# Altium PCB BodyPCB.PcbDoc
Units mil, origin at the board's own origin, x right, y up, seen from the top; angles counter-clockwise.
Board outline 2795.28 x 4094.49 mil, 2 copper layers (Top Layer, Bottom Layer); 58 components, 60 nets, 254 pads, 20 vias.
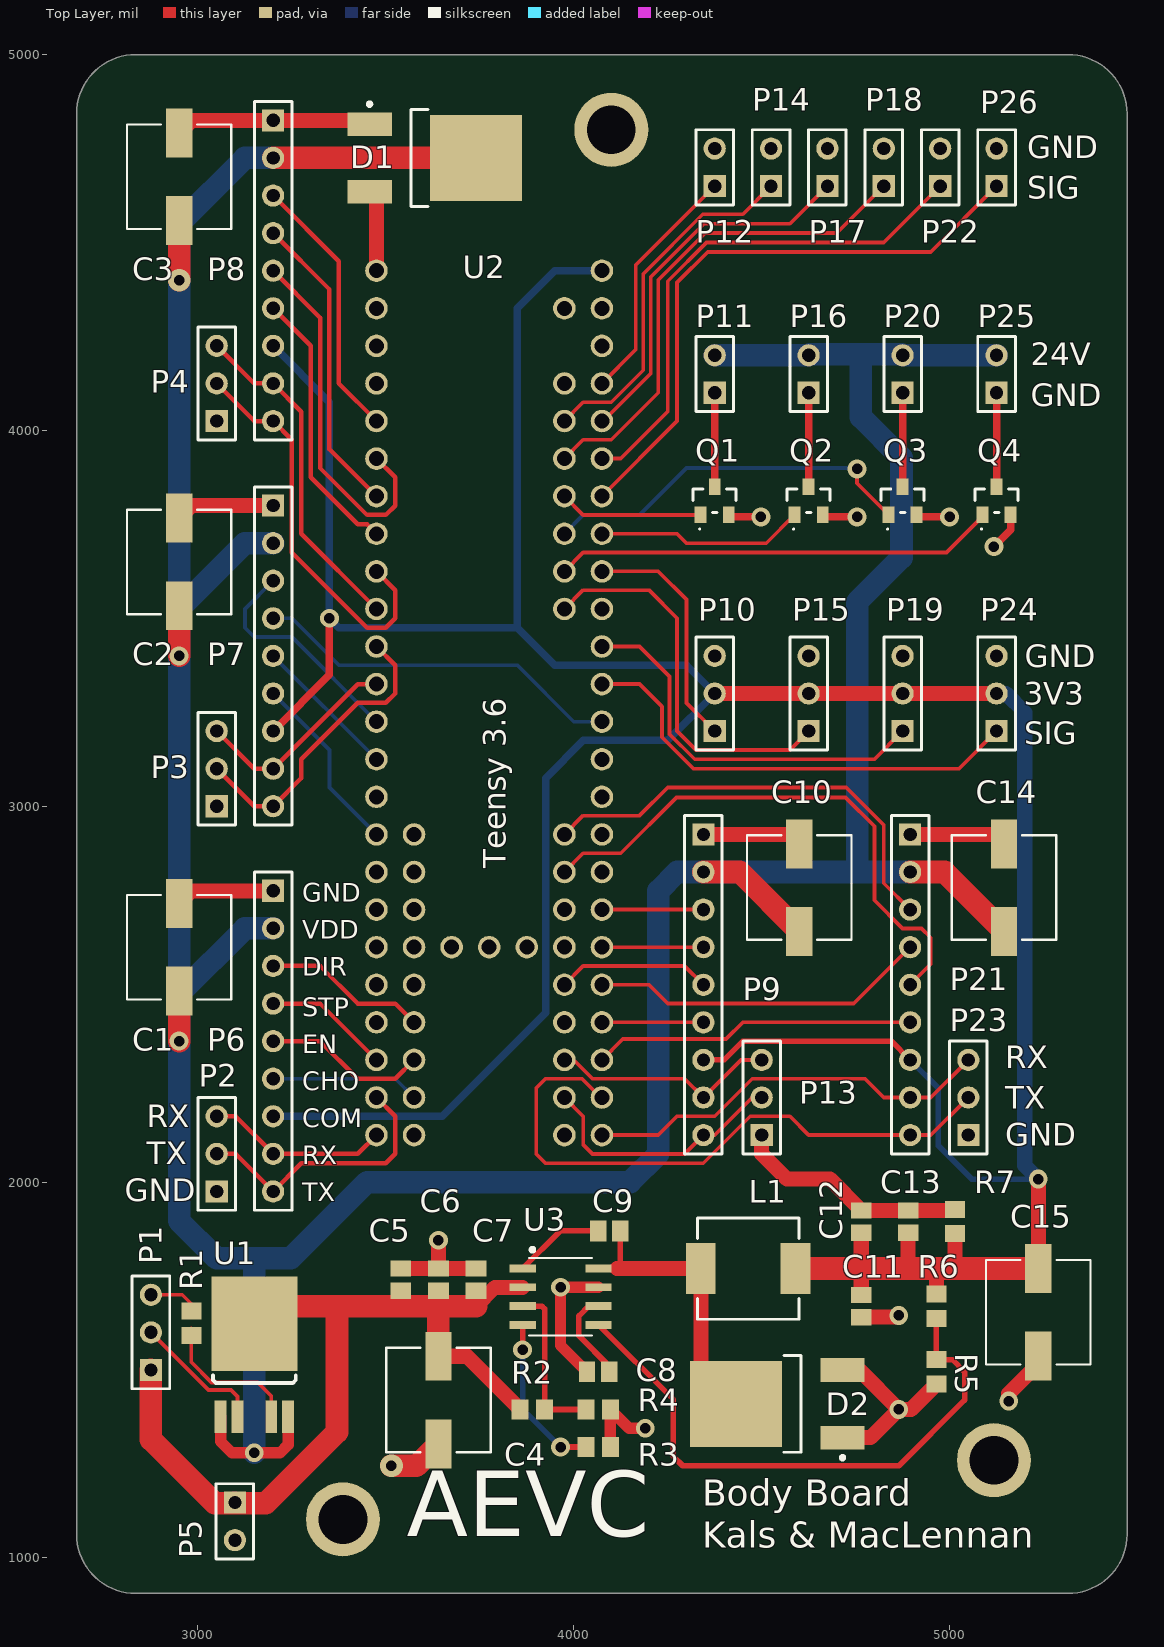
[diagram p0: Top Layer view]
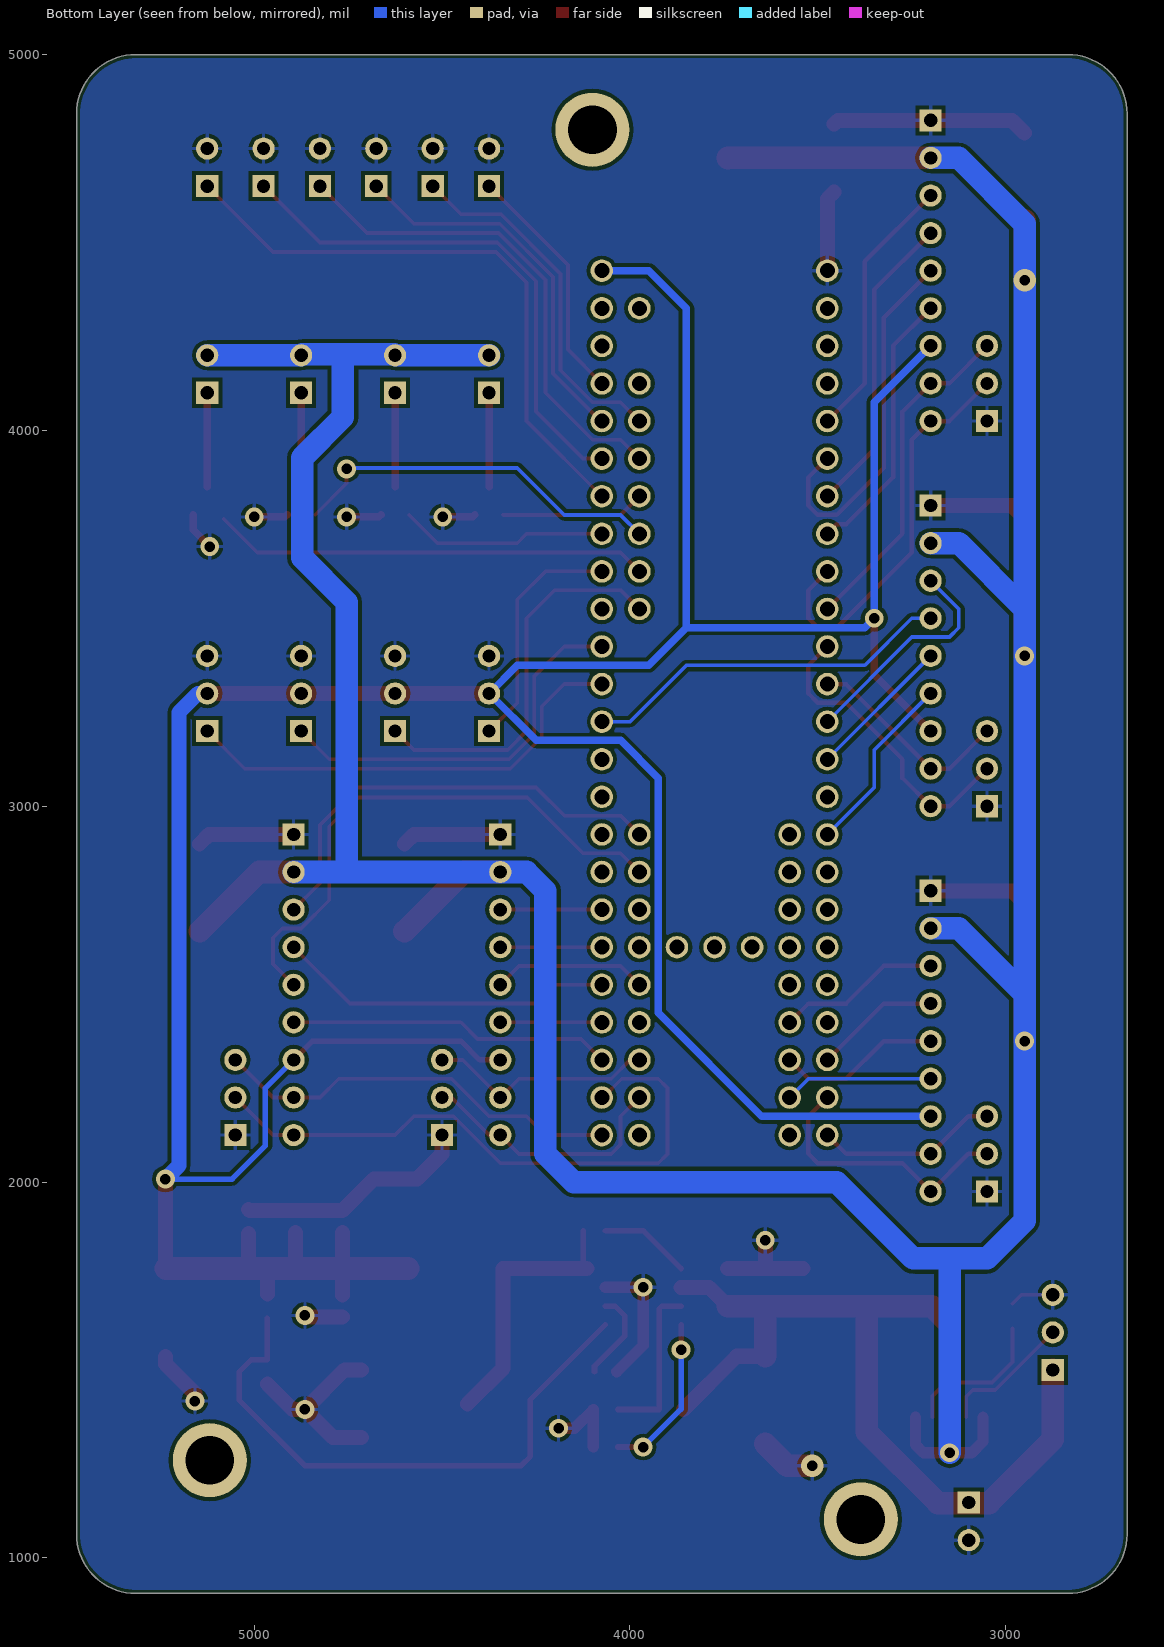
[diagram p1: Bottom Layer view, seen from below]

## Layer stack, top to bottom
Top Solder: solder mask 0.4, Solder Resist, Dk 3.5
Top Layer: signal copper 1.4
Dielectric 1: dielectric 12.6, FR-4, Dk 4.8
Bottom Layer: signal copper 1.4
Bottom Solder: solder mask 0.4, Solder Resist, Dk 3.5

## Board outline
2677.17,1062.99 2677.17,4842.52 cw(c2834.65,4842.52) 2834.65,5000 5314.96,5000 cw(c5314.96,4842.52) 5472.44,4842.52 5472.44,1062.99 cw(c5314.96,1062.99) 5314.96,905.51 2834.65,905.51 cw(c2834.65,1062.99)

## Design rules (kind name [scope] priority, off if disabled: settings)
BoardOutlineClearance [All] p1: gap=10 ignorepadtopadclearanceinfootprint=FALSE
Clearance Clearance_1 [InNamedPolygon('GND_plane')] p1: gap=10 ignorepadtopadclearanceinfootprint=FALSE
Clearance [All] p2: gap=10 ignorepadtopadclearanceinfootprint=FALSE except(0: Arc-Hole Track-Hole SMDPad-Hole THPad-Hole Via-Hole Fill-Hole Poly-Hole Region-Hole Text-Hole)
HoleSize [All] p1: absolutevalues=TRUE maxlimit=248.03 minlimit=11.81 maxpercent=80.000 minpercent=20.000
PolygonConnect [All] p1: connectstyle=Relief reliefconductorwidth=10 reliefentries=4 polygonreliefangle="90 Angle" airgapwidth=10
RoomDefinition U_StepperInterface6 [InComponentClass('U_StepperInterface6')] p1: confinementstyle=ConfineIn formatcopy=TRUE lockcomponents=FALSE outline 4275,2058.5 4775,2058.5 4775,3008.5 4275,3008.5
RoomDefinition U_StepperInterface5 [InComponentClass('U_StepperInterface5')] p2: confinementstyle=ConfineIn formatcopy=TRUE lockcomponents=FALSE outline 4820,2047 5320,2047 5320,3022 4820,3022
RoomDefinition U_StepperInterface4 [InComponentClass('U_StepperInterface4')] p3: confinementstyle=ConfineIn formatcopy=TRUE lockcomponents=FALSE outline 2791.34,980.32 3267.72,980.32 3267.72,2842.52 2791.34,2842.52
RoomDefinition U_StepperInterface3 [InComponentClass('U_StepperInterface3')] p4: confinementstyle=ConfineIn formatcopy=TRUE lockcomponents=FALSE outline 2775,3950 3275,3950 3275,4900 2775,4900
RoomDefinition U_StepperInterface2 [InComponentClass('U_StepperInterface2')] p5: confinementstyle=ConfineIn formatcopy=TRUE lockcomponents=FALSE outline 2775,2925 3275,2925 3275,3875 2775,3875
RoomDefinition Drive2Pin4 [InComponentClass('Drive2Pin4')] p6: confinementstyle=ConfineIn formatcopy=TRUE lockcomponents=FALSE outline 4975,3675 5200,3675 5200,4275 4975,4275
RoomDefinition Drive2Pin3 [InComponentClass('Drive2Pin3')] p7: confinementstyle=ConfineIn formatcopy=TRUE lockcomponents=FALSE outline 4725,3675 4950,3675 4950,4275 4725,4275
RoomDefinition Drive2Pin2 [InComponentClass('Drive2Pin2')] p8: confinementstyle=ConfineIn formatcopy=TRUE lockcomponents=FALSE outline 4475,3675 4700,3675 4700,4275 4475,4275
RoomDefinition Drive2Pin1 [InComponentClass('Drive2Pin1')] p9: confinementstyle=ConfineIn formatcopy=TRUE lockcomponents=FALSE outline 4225,3675 4450,3675 4450,4275 4225,4275
RoutingVias [All] p1: holewidth=28 width=50 viastyle="Through Hole" minholewidth=28 minwidth=50 maxholewidth=28 maxwidth=50
SolderMaskExpansion [All] p1: expansion=4
Width [All] p1: maxlimit=60 minlimit=8 preferedwidth=10 minimp=50.000000 maximp=50.000000 favimp=50.000000
29 further rules are at their usual default settings.

## Classes and differential pairs
channel class StepperInterface: U_StepperInterface2 U_StepperInterface3 U_StepperInterface4 U_StepperInterface5 U_StepperInterface6
channel class Sense3Pin: Sense3Pin1 Sense3Pin2 Sense3Pin3 Sense3Pin4
channel class Sense2Pin: Sense2Pin1 Sense2Pin2 Sense2Pin3 Sense2Pin4 Sense2Pin5 Sense2Pin6
channel class Drive2Pin: Drive2Pin1 Drive2Pin2 Drive2Pin3 Drive2Pin4
component class U_StepperInterface6: C10 P9 P13
component class U_StepperInterface5: C14 P21 P23
component class U_StepperInterface4: C1 P5 P6
component class U_StepperInterface3: C3 P4 P8
component class U_StepperInterface2: C2 P3 P7
component class U_POS3V3: C12 C13 C15 R5 R6 R7
component class U_LMR14050_mod: C4 C5 C6 C7 C8 C9 C11 D2 L1 R2 R3 R4 U3
component class Sense3Pin4: P24
component class Sense3Pin3: P19
component class Sense3Pin2: P15
component class Sense3Pin1: P10
component class Sense2Pin6: P26
component class Sense2Pin5: P18
component class Sense2Pin4: P22
component class Sense2Pin3: P14
component class Sense2Pin2: P17
component class Sense2Pin1: P12
component class Main: D2 P1 P5 R1 U1 U2
component class Drive2Pin4: P25 Q4
component class Drive2Pin3: P20 Q3
component class Drive2Pin2: P16 Q2
component class Drive2Pin1: P11 Q1

## Components (designator, comment, footprint, x,y, rotation, side; value= is the part's Value field where it differs from the comment)
C1 "EEEFK1V680XP" CAP_EEFK_D8 2950,2625 r90 top value=82uF (schematic designator C10)
C2 "EEEFK1V680XP" CAP_EEFK_D8 2950,3650 r90 top value=82uF (schematic designator C10)
C3 "EEEFK1V680XP" CAP_EEFK_D8 2950,4675 r90 top value=82uF (schematic designator C10)
C4 "EEEFK1V680XP" CAP_EEFK_D8 3640,1420 r270 top value=82uF
C5 "Cap" C0805 3540,1740.47 r270 top value=10µF
C6 "Cap" C0805 3640,1740.47 r270 top value=10µF
C7 "Cap" C0805 3740,1740.47 r270 top value=0.1µF
C8 "Cap" C0805 4065,1495 r0 top value=22µF
C9 "Cap" C0805 4094.53,1870 r180 top value=0.1µF
C10 "EEEFK1V680XP" CAP_EEFK_D8 4600,2783.5 r90 top value=82uF
C11 "Cap" C0805 4765,1670 r90 top value=0.1µF
C12 "Cap" C0805 4765,1895 r270 top value=10µF
C13 "Cap" C0805 4890,1895 r270 top value=10µF
C14 "EEEFK1V680XP" CAP_EEFK_D8 5145,2783.5 r90 top value=82uF (schematic designator C10)
C15 "EEEFK1V680XP" CAP_EEFK_D8 5236.22,1653.54 r270 top value=82uF
D1 "MBRD835LG" ONSC-DPAK-3-369C-01_V 3629.92,4724.8 r0 top (schematic designator D2)
D2 "MBRD835LG" ONSC-DPAK-3-369C-01_V 4541.77,1409.84 r180 top (schematic designator D1)
L1 "Ind" IHLP-2525C7 4464.02,1770 r0 top value=3.3µH
P1 "Header 3" HDR1X3 2875,1500 r90 top
P2 "Header 3" HDR1X3 3050,1975 r90 top (schematic designator P12)
P3 "Header 3" HDR1X3 3050,3000 r90 top (schematic designator P12)
P4 "Header 3" HDR1X3 3050,4025 r90 top (schematic designator P12)
P5 "Header 2" HDR1X2 3098.43,1147.24 r270 top (schematic designator P2)
P6 "Header 9" HDR1X9 3200,2775 r270 top (schematic designator P8)
P7 "Header 9" HDR1X9 3200,3800 r270 top (schematic designator P8)
P8 "Header 9" HDR1X9 3200,4825 r270 top
P9 "Header 9" HDR1X9 4345,2925 r270 top (schematic designator P8)
P10 "Header 3" HDR1X3 4375,3200 r90 top (schematic designator P23)
P11 "Header 2" HDR1X2 4375,4100 r90 top (schematic designator P23)
P12 "Header 2" HDR1X2 4375,4650 r90 top (schematic designator P25)
P13 "Header 3" HDR1X3 4500,2125 r90 top (schematic designator P12)
P14 "Header 2" HDR1X2 4525,4650 r90 top (schematic designator P25)
P15 "Header 3" HDR1X3 4625,3200 r90 top (schematic designator P23)
P16 "Header 2" HDR1X2 4625,4100 r90 top (schematic designator P23)
P17 "Header 2" HDR1X2 4675,4650 r90 top (schematic designator P25)
P18 "Header 2" HDR1X2 4825,4650 r90 top (schematic designator P25)
P19 "Header 3" HDR1X3 4875,3200 r90 top (schematic designator P23)
P20 "Header 2" HDR1X2 4875,4100 r90 top (schematic designator P23)
P21 "Header 9" HDR1X9 4895,2925 r270 top (schematic designator P8)
P22 "Header 2" HDR1X2 4975,4650 r90 top (schematic designator P25)
P23 "Header 3" HDR1X3 5050,2125 r90 top (schematic designator P12)
P24 "Header 3" HDR1X3 5125,3200 r90 top (schematic designator P23)
P25 "Header 2" HDR1X2 5125,4100 r90 top (schematic designator P23)
P26 "Header 2" HDR1X2 5125,4650 r90 top (schematic designator P25)
Q1 "ZXMS6004FFTA" DIOD-SOT23F-3_V 4375,3812.8 r90 top
Q2 "ZXMS6004FFTA" DIOD-SOT23F-3_V 4625,3812.8 r90 top (schematic designator Q1)
Q3 "ZXMS6004FFTA" DIOD-SOT23F-3_V 4875,3812.8 r90 top (schematic designator Q1)
Q4 "ZXMS6004FFTA" DIOD-SOT23F-3_V 5125,3812.8 r90 top (schematic designator Q1)
R1 "Res" R0805 2982.28,1624.02 r270 top value=1k
R2 "Res" R0805 3890,1395 r180 top value=39k
R3 "Res" R0805 4065,1295 r180 top value=33k
R4 "Res" R0805 4065,1395 r180 top value=10k
R5 "Res" R0805 4965,1495 r90 top value=2.7k
R6 "Res" R0805 4965,1670 r90 top value=15k
R7 "Res" R0805 5015,1895 r270 top value=1k
U1 "BTS50080-1TEA" BTS50080 3150.24,1623.03 r0 top
U2 "Teensy3p6" TEENSY3P6_FULL 3775,3225 r0 top
U3 "LMR14050SDDAR" DDA8 3965,1695 r0 top value=Value

## Footprints (in the part's own frame and the unit in brackets; to place one, negate y for a bottom-side part, rotate by r counter-clockwise, add the part's x,y. Pads: shape width x height; smd on the part's side, far side on the other; paste and mask are expansions set on the pad)
BTS50080 [mm] "Smart High-Side Power Switch"
  rect 5.8x6.4 smd: 1(0,0)
  rect 0.8x2.2 smd: 2(-2.28,-6.3) 3(-1.14,-6.3) 4(1.14,-6.3) 5(2.28,-6.3)
  silkscreen extent -2.8,-4 2.8,-3.5
C0805 [mm]
  rect 1.1x1.4 smd: 1(-0.75,0) 2(0.75,0)
  body extent -1.1,-0.72 1.1,0.72, height 1.4
CAP_EEFK_D8 [mil]
  rect 130x70 smd paste+0 mask+0: 1(-116.5,0) 2(116.5,0)
  silkscreen extent -139,-139 139,139, body extent -154,-134 154,134, height 317
DDA8 [mil]
  rect 70x21 smd paste+0 mask+0: 1(-101,75) 2(-101,25) 3(-101,-25) 4(-101,-75) 5(101,-75) 6(101,-25) 7(101,25) 8(101,75)
  silkscreen extent -84,-103 84,130, body extent -122,-100 122,100, height 66
DIOD-SOT23F-3_V [mm] "SOTFL, 3-Leads, Body 2.9x1.6mm, Pitch 0.95mm"
  rect 1.11x0.8 smd: 1(-0.945,0.95) 2(-0.945,-0.95) 3(0.945,0)
  silkscreen extent -1.96,-1.45 0.8,1.45, body extent -1.2,-1.45 1.2,1.45, height 1
HDR1X2 [mm] "Connector; Header; 2 Position"
  rect 1.5x1.5 hole 0.9: 1(0,0)
  round 1.5 hole 0.9: 2(2.54,0)
  silkscreen extent -1.27,-1.27 3.81,1.27
HDR1X3 [mm] "Connector; Header; 3 Position"
  rect 1.5x1.5 hole 0.9: 1(0,0)
  round 1.5 hole 0.9: 2(2.54,0) 3(5.08,0)
  silkscreen extent -1.27,-1.27 6.35,1.27
HDR1X9 [mm]
  rect 1.5x1.5 hole 0.9: 1(0,0)
  round 1.5 hole 0.9: 2(2.54,0) 3(5.08,0) 4(7.62,0) 5(10.16,0) 6(12.7,0) 7(15.24,0) 8(17.78,0) 9(20.32,0)
  silkscreen extent -1.27,-1.27 21.59,1.27
IHLP-2525C7 [mm] "Chip Inductor, 2-Leads, Body 6.47x6.47mm, IPC Medium Density"
  rect 2.02x3.429 smd: 1(-3.2,0) 2(3.2,0)
  silkscreen extent -3.43,-3.43 3.43,3.43, body extent -3.54,-3.3 3.54,3.37, height 2.89
ONSC-DPAK-3-369C-01_V [mm] "DPAK, 3-Leads, Body 6.54x6.095mm, Pitch 2.29mm"
  rect 3x1.6 smd: 1(-4.4,2.29) 3(-4.4,-2.29)
  rect 6.2x5.8 smd: 4(2.8,0)
  silkscreen extent -4.52,-3.27 -0.45,3.76, body extent -1.6,-3.27 4.49,3.27, height 2.38
R0805 [mm]
  rect 1.15x1.35 smd: 1(-0.825,0) 2(0.825,0)
  body extent -1.05,-0.67 1.05,0.67, height 0.9
TEENSY3P6_FULL [mil] "TH, all pins"
  round 60 hole 40: 0(-300,1200) 1(-300,1100) 2(-300,1000) 3(-300,900) 4(-300,800) 5(-300,700) 6(-300,600) 7(-300,500) 8(-300,400) 9(-300,300) 10(-300,200) 11(-300,100) 12(-300,0) 13(-300,-100) 14(-300,-200) 15(-300,-300) 16(-300,-400) 17(-300,-500) 18(-300,-600) 19(-300,-700) 20(-300,-800) 21(-300,-900) 22(-300,-1000) 23(-300,-1100) 24(300,-1100) 25(300,-1000) 26(300,-900) 27(300,-800) 28(300,-700) 29(300,-600) 30(300,-500) 31(300,-400) 32(300,-300) 33(300,-200) 34(300,-100) 35(300,0) 36(300,100) 37(300,200) 38(300,300) 39(300,400) 40(300,500) 41(300,600) 42(300,700) 43(300,800) 44(300,900) 45(300,1000) 46(300,1100) 47(300,1200) 48(-200,-600) 49(-100,-600) 50(0,-600) 51(100,-600) 52(200,-600) 53(-200,-300) 54(-200,-400) 55(-200,-500) 56(-200,-700) 57(-200,-800) 58(-200,-900) 59(-200,-1000) 60(-200,-1100) 61(200,-1100) 62(200,-1000) 63(200,-900) 64(200,-800) 65(200,-700) 66(200,-500) 67(200,-400) 68(200,-300) 69(200,300) 70(200,400) 71(200,500) 72(200,600) 73(200,700) 74(200,800) 75(200,900) 76(200,1100)

## Part data
C1 C2 C3 C4 C10 C14 C15: "Polarized Capacitor (Surface Mount)", Supplier Part Number 1=P18960DKR-ND, Built_By=EMA_UL_Team, C="Copyright (C) 2015 Accelerated Designs. All rights reserved", Manufacturer_Part_Number=EEEFK1V680XP, Supplier 1=Digi-Key, Vendor=Panasonic
C5 C6 C7 C8 C9 C11 C12 C13: "capacitor"
D1 D2: library part CMP-1055-00169-1, "SWITCHMODE(TM) Power Rectifier, 3-Pin DPAK, Pb-Free, Tube", Manufacturer="On Semiconductor", ComponentLink1Description="Manufacturer URL", ComponentLink1URL=http://www.onsemi.com/, ComponentLink2Description=Datasheet, ComponentLink2URL=http://www.onsemi.cn/pub_link/Collateral/MBRD835L-D.PDF, ComponentLink3Description="Package Specification", ComponentLink3URL=http://www.onsemi.cn/pub_link/Collateral/369C.PDF, Configuration=Single, DatasheetVersion="Rev. 11", IFSM Max (A)=75, Mounting Technology="Surface Mount", PackageDescription="3-Pin Flange Mount, Body 6.54 x 6.095 mm, Pitch 2.29 mm", PackageReference=DPAK-3-369C-01, PackageVersion="Rev. E, 02/2014", Packing=Tube, PartNumber=MBRD835LG, RoHS=TRUE
L1: "Inductor", Supplier Part Number 1=541-2580-1-ND, Supplier 1=Digi-Key
P1 P2 P3 P4 P10 P13 P15 P19 P23 P24: "Header, 3-Pin", LatestRevisionDate=17-Jul-2002, LatestRevisionNote="Re-released for DXP Platform.", Publisher="Altium Limited"
P5 P11 P12 P14 P16 P17 P18 P20 P22 P25 P26: "Header, 2-Pin", LatestRevisionDate=17-Jul-2002, LatestRevisionNote="Re-released for DXP Platform.", Publisher="Altium Limited"
P6 P7 P8 P9 P21: "Header, 9-Pin", LatestRevisionDate=17-Jul-2002, LatestRevisionNote="Re-released for DXP Platform.", Publisher="Altium Limited"
Q1 Q2 Q3 Q4: library part CMP-2000-07435-1, "N-Channel Self Protected Enhancement Mode Intellifet(TM) MOSFET, 60 V, 1.3 A, -40 to 150 degC, 3-Pin SOT23, RoHS, Tape and Reel", Current - Output (Max)=1.3A, Manufacturer="Diodes Inc", Operating Temperature=-40°C~150°C(TJ), Package / Case=SOT-23-3FlatLeads, Package Description="3-Pin Small Outline Transistor Flat Lead, Body 2.9 x 1.6 mm, Pitch 0.95 mm", Package Reference=SOT23F-3, Standard Package=3,000, Supplier Device Package=SOT-23F, Voltage - Load=60V(Max), Voltage - Supply (Vcc/Vdd)=3.3V,5V, Category=IntegratedCircuits(ICs), Datasheet URL=https://datasheet.ciiva.com/15109/getdatasheetpartid-411522-15109086.pdf, Datasheet Version="Rev. 6-2, 10/2014", Family=PMIC-PowerDistributionSwitches,LoadDrivers, Fault Protection=CurrentLimiting(Fixed),OverTemperature,OverVoltage, Featured Product=ZXMS6004FF60VN-ChannelMOSFET, Features=AutoRestart, Input Type=Non-Inverting, Interface=On/Off, Manufacturer URL=http://www.diodes.com/, Mounting Technology=SurfaceMount, Number of Outputs=1, Online Catalog=GeneralPurpose, Other Names=ZXMS6004FFTR, Output Configuration=LowSide, Output Type=N-Channel, Packaging=Tape&Reel(TR), PCN Design/Specification=PartMarkingUpdate25/Sep/2015, Product Training Modules=IntelliFET's, Ratio - Input=Output:1:1, Rds On (Typ)=350mOhm, RoHS Information=RoHSCertofCompliance, Series=Automotive,AEC-Q101,INTELLIFET®, Switch Type=GeneralPurpose
R1 R2 R3 R4 R5 R6 R7: "resistor"
U1: "Smart High-Side Power Switch"
U3: "dc-dc converter", Supplier Part Number 1=296-41103-5-ND, Built_By=EMA_UL_Team, C="Copyright (C) 2016 Accelerated Designs. All rights reserved", Manufacturer_Part_Number=LMR14050SDDAR, RefDes=RefDes, Supplier 1=Digi-Key, Type=Type, Vendor="Texas Instruments"

## Free pads (board coordinates)
  round 196.85 hole 129.92 unplated: 1(3385.83,1102.36) 2(4100,4800) 3(5118.11,1259.84)

## Via types
v1: diameter 50, hole 28, Top Layer to Bottom Layer, 18 vias
v2: diameter 60, hole 28, Top Layer to Bottom Layer, 2 vias

## Nets (pads, with @x,y where several pads share a name; then routed paths per layer and width w, separated by ;. In a path a pad name is that pad's centre, name@x,y a point inside that pad or via, vN(x,y) a via of type N, cw(c..) or ccw(c..) an arc to the next point about the centre after c; other vN are vias at no path point)
2ACTIVE1: Q1.1 U2.72 | length 383.6
  Top Layer w10: U2.72 4025,3775 4337.01,3775 Q1.1
2ACTIVE2: Q2.1 U2.40 | length 554.3
  Top Layer w10: U2.40 4275,3725 4300,3700 4512.01,3700 Q2.1
2ACTIVE3: Q3.1 U2.71 | length 1004.2
  Top Layer w10: v1(4753.94,3897.64) 4753.94,3859.25 Q3.1
  Bottom Layer w10: U2.71 4025,3775 4175,3775 4300,3900 v1@4750,3900
2ACTIVE4: Q4.1 U2.70 | length 1163.4
  Top Layer w10: U2.70 4025,3675 4991.54,3675 Q4.1@5080.71,3764.17
2SIGNAL1: P12.1 U2.44 | length 649.3
  Top Layer w10: U2.44 4165,4215 4165,4440 P12.1
2SIGNAL2: P17.1 U2.43 | length 1009.2
  Top Layer w10: U2.43 4078.28,4025 4205,4151.72 4205,4408.28 4346.72,4550 4575,4550 P17.1
2SIGNAL3: P14.1 U2.74 | length 959.2
  Top Layer w10: U2.74 4025,4075 4100,4075 4185,4160 4185,4416.57 4343.43,4575 4450,4575 P14.1
2SIGNAL4: P22.1 U2.42 | length 1403.4
  Top Layer w10: U2.42 4125,3925 4250,4050 4250,4396.72 4353.28,4500 4825,4500 P22.1
2SIGNAL5: P18.1 U2.73 | length 1326
  Top Layer w10: U2.73 4025,3975 4100,3975 4225,4100 4225,4400 4350,4525 4700,4525 P18.1
2SIGNAL6: P26.1 U2.41 | length 1607.5
  Top Layer w10: U2.41 4275,4025 4275,4393.43 4356.57,4475 4950,4475 P26.1
3SIGNAL1: P10.1 U2.39 | length 637.1
  Top Layer w10: U2.39 4225,3625 4300,3550 4300,3275 P10.1
3SIGNAL2: P15.1 U2.69 | length 1043.2
  Top Layer w10: U2.69 4025,3575 4200,3575 4275,3500 4275,3200 4325,3150 4575,3150 P15.1
3SIGNAL3: P19.1 U2.37 | length 1045.1
  Top Layer w10: U2.37 4175,3425 4255,3345 4255,3191.72 4321.72,3125 4800,3125 P19.1
3SIGNAL4: P24.1 U2.36 | length 1232.4
  Top Layer w10: U2.36 4175,3325 4235,3265 4235,3183.43 4318.43,3100 5025,3100 P24.1
CHOP_M2: P7.6 U2.15 | length 488.9
  Bottom Layer w10: P7.6 3350,3150 3350,3050 U2.15
CHOP_M3: P8.6 U2.7 | length 728.6
  Top Layer w12: P8.6 3300,4225 3300,3875 3425,3750 3450,3750 U2.7
CHOP_M4: P6.6 U2.59 | length 395.7
  Bottom Layer w10: P6.6 3525,2275 U2.59
CHOP_M5: P21.6 U2.26 | length 861.4
  Top Layer w10: U2.26 4130.47,2380.47 4405.47,2380.47 4450,2425 P21.6
CHOP_M6: P9.6 U2.27 | length 270
  Top Layer w10: U2.27 P9.6
COMM_U_StepperInterface2: C11.2 C12.2 C13.2 C15.1 L1.2 P6.7 P7.7 P8.7 P9.7 P10.2 P15.2 P19.2 P21.7 P24.2 R6.2 R7.2 U2.47 | length 9941
  Top Layer w15: P9.7 4400,2325 4450,2375 4845,2375 P21.7
  Top Layer w20: P7.7 3350,3350 v1(3350,3500)
  Top Layer w40: P10.2 P15.2 P19.2 P24.2 ; C11.2 4765,1770 C12.2 ; 4890,1770 C13.2 ; R6.2 4965,1770 ; 5015,1770 R7.2 ; C15.1 v1(5236.22,2007.87)
  Top Layer w60: L1.2 4765,1770 4890,1770 4965,1770 5015,1770 C15.1@5234.57,1770
  Bottom Layer w15: P21.7 4970,2250 4970,2096.93 5059.06,2007.87 v1(5236.22,2007.87)
  Bottom Layer w20: P6.7 3650,2175 3925,2450 3925,3075 4025,3175 4250,3175 P10.2 4300,3375 3950,3375 3850,3475 ; P8.7 3350,4075 v1(3350,3500) 3375,3475 3850,3475 ; U2.47 3950,4425 3850,4325 3850,3475
  Bottom Layer w40: P24.2 5150,3300 5200,3250 5200,2044.09 v1(5236.22,2007.87)
DIR_M2: P7.3 U2.12 | length 609.6
  Bottom Layer w10: P7.3 3125,3525 3125,3475 3150,3450 3250,3450 U2.12
DIR_M3: P8.3 U2.4 | length 713.9
  Top Layer w12: P8.3 3375,4450 3375,4125 U2.4
DIR_M4: P6.3 U2.57 | length 437.1
  Top Layer w12: P6.3 3325,2575 3425,2475 3525,2475 U2.57
DIR_M5: P21.3 U2.68 | length 1197.2
  Top Layer w10: U2.68 4025,2975 4175,2975 4250,3050 4725,3050 4825,2950 4825,2795 P21.3
DIR_M6: P9.3 U2.30 | length 270
  Top Layer w10: U2.30 P9.3
EN_M2: P7.5 U2.13 | length 388.9
  Bottom Layer w10: P7.5 U2.13
EN_M3: P8.5 U2.5 | length 984.6
  Top Layer w12: P8.5 3325,4300 3325,3900 3450,3775 3500,3775 3525,3800 3525,3875 U2.5
EN_M4: P6.5 U2.58 | length 437.1
  Top Layer w12: P6.5 3325,2375 3425,2275 3525,2275 U2.58
EN_M5: P21.5 U2.67 | length 1474.8
  Top Layer w10: U2.67 4025,2875 4125,2875 4273.36,3023.36 4723.36,3023.36 4800,2946.72 4800,2750 4875,2675 4925,2675 4950,2650 4950,2580 P21.5
EN_M6: P9.5 U2.65 | length 419.9
  Top Layer w10: U2.65 4025,2575 4295,2575 P9.5 P9.5@4353.5,2525
GND: C1.2 C2.2 C3.2 C4.2 C5.1 C6.1 C7.1 C8.1 C10.2 C11.1 C12.1 C13.1 C14.2 C15.2 D1.1 D1.3 D2.1 D2.3 P1.3 P2.1 P3.1 P4.1 P5.2 P6.1 P7.1 P8.1 P9.1 P10.3 P12.2 P13.1 P14.2 P15.3 P17.2 P18.2 P19.3 P21.1 P22.2 P23.1 P24.3 P26.2 Q1.2 Q2.2 Q3.2 Q4.2 R1.1 R3.1 R4.1 R5.1 R7.1 U2.0 U3.7 | length 4664.1
  Top Layer w10: P1.3 2958.46,1700 R1.1@2982.28,1676.18
  Top Layer w20: Q1.2 4418.31,3769.68 v1(4498.03,3769.68) ; Q2.2 4668.31,3769.68 v1(4753.94,3769.68) ; Q3.2 4918.31,3769.68 v1(5000,3769.68) ; v1(5118.11,3690.94) 5162.4,3735.24 Q4.2
  Top Layer w30: C8.1 3965,1565.47 v1(3965,1720) U3.7 ; R3.1 R4.1 4147.48,1345 v1(4190,1345)
  Top Layer w40: C1.2 2983.5,2775 P6.1 ; C2.2 2983.5,3800 P7.1 ; C3.2 2983.5,4825 P8.1 3446.65,4825 D1.1 ; D1.3 3475,4616.34 U2.0 ; C5.1 C6.1 ; v1(3640,1845) C6.1 ; C7.1 C6.1 ; P9.1 4575,2925 C10.2 ; P13.1 4500,2074.8 4566.93,2007.87 4681.65,2007.87 C12.1 C13.1 5012.05,1924.53 R7.1 ; D2.1@4715,1320 4790,1320 v1(4865,1395) ; D2.3 4760,1500 v1(4865,1395) ; C11.1 4860.47,1640.47 v1(4865,1645) ; P21.1 5120,2925 C14.2 ; R5.1 4897.48,1395 v1(4865,1395) ; v1(5157.48,1417.32) 5157.48,1437.48 5236.22,1516.22 C15.2@5236.22,1535.43
  Top Layer w60: v2(3515,1245) 3581.5,1245 C4.2
NetC8_2: C8.2 U3.6 | length 245.5
  Top Layer w15: U3.6 4040,1670 4013.5,1643.5 4013.5,1590.93 4094.53,1509.91 C8.2
NetC9_1: C9.1 D2.4 L1.1 U3.8 | length 725.7
  Top Layer w15: 4115,1770 4124.06,1779.06 C9.1
  Top Layer w40: 4115,1770 L1.1 4338.03,1503.97 D2.4@4432,1410
NetC9_2: C9.2 U3.1 | length 242.4
  Top Layer w15: U3.1 3964,1870 C9.2
NetP1_2: P1.2 U1.3 | length 355.6
  Top Layer w10: P1.2 3028.15,1446.85 3088.15,1446.85 3105.35,1429.65 U1.3
NetP23_Drive2Pin1_1: P11.1 Q1.3 | length 250
  Top Layer w20: Q1.3 P11.1
NetP23_Drive2Pin2_1: P16.1 Q2.3 | length 250
  Top Layer w20: Q2.3 P16.1
NetP23_Drive2Pin3_1: P20.1 Q3.3 | length 250
  Top Layer w20: Q3.3 P20.1
NetP23_Drive2Pin4_1: P25.1 Q4.3 | length 250
  Top Layer w20: Q4.3 P25.1
NetR1_2: R1.2 U1.4 | length 396.3
  Top Layer w10: R1.2@2982.28,1611.22 R1.2 2982.28,1521 3036.43,1466.85 3159.13,1466.85 3195.12,1430.87 U1.4
NetR2_1: R2.1 R4.2 U3.3 | length 439.1
  Top Layer w15: U3.3 3915,1670 3922.48,1662.52 R2.1 R4.2
NetR3_2: R3.2 U3.4 | length 434.4
  Top Layer w15: v1(3864,1554) U3.4 ; v1(3965,1295) R3.2
  Bottom Layer w15: v1(3864,1554) 3864,1396 v1(3965,1295)
NetR5_2: R5.2 R6.1 U3.5 | length 1563.8
  Top Layer w15: U3.5 4265,1421 4265,1270 4290,1245 4865,1245 5040,1420 5040,1495 5007.52,1527.48 R5.2 R6.1
RXD_M2: P3.3 P7.8 U2.11 | length 559.6
  Top Layer w12: P3.3 3150,3100 P7.8 3425,3325 U2.11
RXD_M3: P4.3 P8.8 U2.9 | length 905.3
  Top Layer w12: P4.3 3150,4125 P8.8 3275,4050 3275,3725 U2.9
RXD_M4: P2.3 P6.8 U2.23 | length 487.1
  Top Layer w12: P2.3 3100,2175 P6.8 3425,2075 U2.23
RXD_M5: P21.8 P23.3 U2.24 | length 1099.3
  Top Layer w10: U2.24 4225,2125 4275,2175 4375,2175 4475,2275 4775,2275 4825,2225 P21.8 4950,2225 P23.3
RXD_M6: P9.8 P13.3 U2.63 | length 607.8
  Top Layer w10: U2.63 4000,2325 4050,2275 4295,2275 P9.8 4445,2325 P13.3
STEP_M2: P7.4 U2.35 | length 988.9
  Bottom Layer w10: P7.4 3250,3500 3375,3375 3850,3375 4000,3225 U2.35
STEP_M3: P8.4 U2.6 | length 813.9
  Top Layer w12: P8.4 3350,4375 3350,3950 U2.6
STEP_M4: P6.4 U2.21 | length 337.1
  Top Layer w12: P6.4 3325,2475 U2.21
STEP_M5: P21.4 U2.28 | length 902.8
  Top Layer w10: U2.28 4200,2525 4250,2475 4745,2475 P21.4
STEP_M6: P9.4 U2.29 | length 270
  Top Layer w10: U2.29 P9.4
TXD_M2: P3.2 P7.9 U2.10 | length 815.7
  Top Layer w12: P3.2 3150,3000 P7.9 3275,3075 3275,3125 3425,3275 3500,3275 3525,3300 3525,3375 U2.10
TXD_M3: P4.2 P8.9 U2.8 | length 1076
  Top Layer w12: P4.2 3150,4025 P8.9 3250,3975 3250,3675 3450,3475 3500,3475 3525,3500 3525,3575 U2.8
TXD_M4: P2.2 P6.9 U2.22 | length 728.6
  Top Layer w12: P2.2 3100,2075 P6.9 3275,2050 3500,2050 3525,2075 3525,2175 U2.22
TXD_M5: P21.9 P23.2 U2.25 | length 1655.3
  Top Layer w10: U2.25 4071.72,2225 4021.72,2275 3925,2275 3900,2250 3900,2075 3925,2050 4344.73,2050 4469.73,2175 4575,2175 4625,2125 P21.9 4950,2125 P23.2
TXD_M6: P9.9 P13.2 U2.62 | length 693.2
  Top Layer w10: U2.62 4025,2175 4025,2100 4050,2075 4295,2075 P9.9 4375,2125 4475,2225 P13.2
VCC: C4.1 C5.2 C6.2 C7.2 P1.1 P5.1 R2.2 U1.1 U3.2 | length 2328.4
  Top Layer w40: C4.1 3716.02,1536.5 R2.2 ; 3740,1670 3790,1720 U3.2
  Top Layer w60: P1.1 2875,1315 3044.33,1145.67 3096.85,1145.67 P5.1 3100,1145.67 3180.67,1145.67 3370,1335 3370,1670 ; U1.1 3197.2,1670 3370,1670 ; C4.1 3640,1670 ; 3740,1670 3640,1670 ; 3370,1670 3640,1670
VDD_U_StepperInterface2: C1.1 C2.1 C3.1 C10.1 C14.1 D1.4 P6.2 P7.2 P8.2 P9.2 P11.2 P16.2 P20.2 P21.2 P25.2 U1.2 U1.5 | length 11121
  Top Layer w30: U1.2 3060.47,1309.61 3090.55,1279.53 v1(3149.61,1279.53) 3218.5,1279.53 3240,1301.02 U1.5
  Top Layer w60: v1(2950,2375) C1.1 ; v1(2950,3400) C2.1 ; v2(2950,4400) C3.1 ; P8.2 3739.96,4725 D1.4 ; P9.2 4442,2825 C10.1 ; P21.2 4987,2825 C14.1
  Bottom Layer w60: v1(3149.61,1279.53) 3149.61,1796.85 ; P6.2 3125,2675 2950,2500 ; P7.2 3125,3700 2950,3525 ; P8.2 3125,4725 2950,4550 v2(2950,4400) 2950,3525 ; 3241.85,1796.85 3149.61,1796.85 ; 3246.85,1796.85 3450,2000 4150,2000 4225,2075 4225,2775 4275,2825 P9.2 4753.94,2825 ; P11.2 P16.2 4627.76,4202.76 4763.78,4202.76 ; P21.2 4753.94,2825 ; P25.2 P20.2 4872.24,4202.76 4763.78,4202.76 ; 2950,2500 v1(2950,3400) 2950,3525 ; 2950,2500 v1(2950,2375) 2950,1896.85 3050,1796.85 3149.61,1796.85 ; 4753.94,2825 4753.94,3543.31 4872.05,3661.42 4872.05,3927.17 4763.78,4035.43 4763.78,4202.76
pads on no net: U2.1 U2.2 U2.3 U2.14 U2.16 U2.17 U2.18 U2.19 U2.20 U2.31 U2.32 U2.33 U2.34 U2.38 U2.45 U2.46 U2.48 U2.49 U2.50 U2.51 U2.52 U2.53 U2.54 U2.55 U2.56 U2.60 U2.61 U2.64 U2.66 U2.75 U2.76

## Polygon pours and split planes (outlines as drawn)
GND on Bottom Layer "GND_plane" (solid, pour order 18): 2677.17,5000 5472.44,5000 5472.44,905.51 2677.17,905.51
no net on Bottom Layer "Bottom Layer-No Net" (solid, pour order 2): 2700,5000
no net on Top Layer "Top Layer-No Net" (solid, pour order 6): 3200,4825

## Silkscreen, mask and mechanical layers (free items; w line width, h text height)
Top Overlay:
  text "GND" at 5206.69,4724.41 h60
  text "SIG" at 5206.69,4616.14 h60
  text "24V" at 5216.54,4173.23 h60
  text "GND" at 5216.54,4064.96 h60
  text "GND" at 5199.8,3370.08 h60
  text "3V3" at 5196.85,3270.67 h60
  text "SIG" at 5198.82,3165.35 h60
  text "GND" at 3277.56,2746.06 h50
  text "VDD" at 3277.56,2647.64 h50
  text "DIR" at 3277.56,2549.21 h50
  text "STP" at 3277.56,2440.94 h50
  text "EN" at 3277.56,2342.52 h50
  text "RX" at 5147.64,2303.15 h60
  text "CHO" at 3277.56,2244.09 h50
  text "TX" at 5147.64,2194.88 h60
  text "RX" at 2864.17,2145.67 h60
  text "COM" at 3277.56,2145.67 h50
  text "GND" at 5147.64,2096.46 h60
  text "TX" at 2864.17,2047.24 h60
  text "RX" at 3277.56,2047.24 h50
  text "GND" at 2805.12,1948.82 h60
  text "TX" at 3277.56,1948.82 h50
  text "Body Board" at 4341.54,1115.16 h120
  text "Kals & MacLennan" at 4341.54,1002.95 h120
  text "AEVC" at 3556.1,1000 h300
Mechanical 1:
  the board outline again, w0.5

## Text inside footprints (layer, text, board x,y; h text height)
U2: Top Overlay "Teensy 3.6" at 3818.9,2834.65 h60 r90